# Altium PCB PCB.PcbDoc
Units mm, origin at the board's own origin, x right, y up, seen from the top; angles counter-clockwise.
Board outline 50 x 32.6 mm, 2 copper layers (Top Layer, Bottom Layer); 14 components, 11 nets, 41 pads, 0 vias.
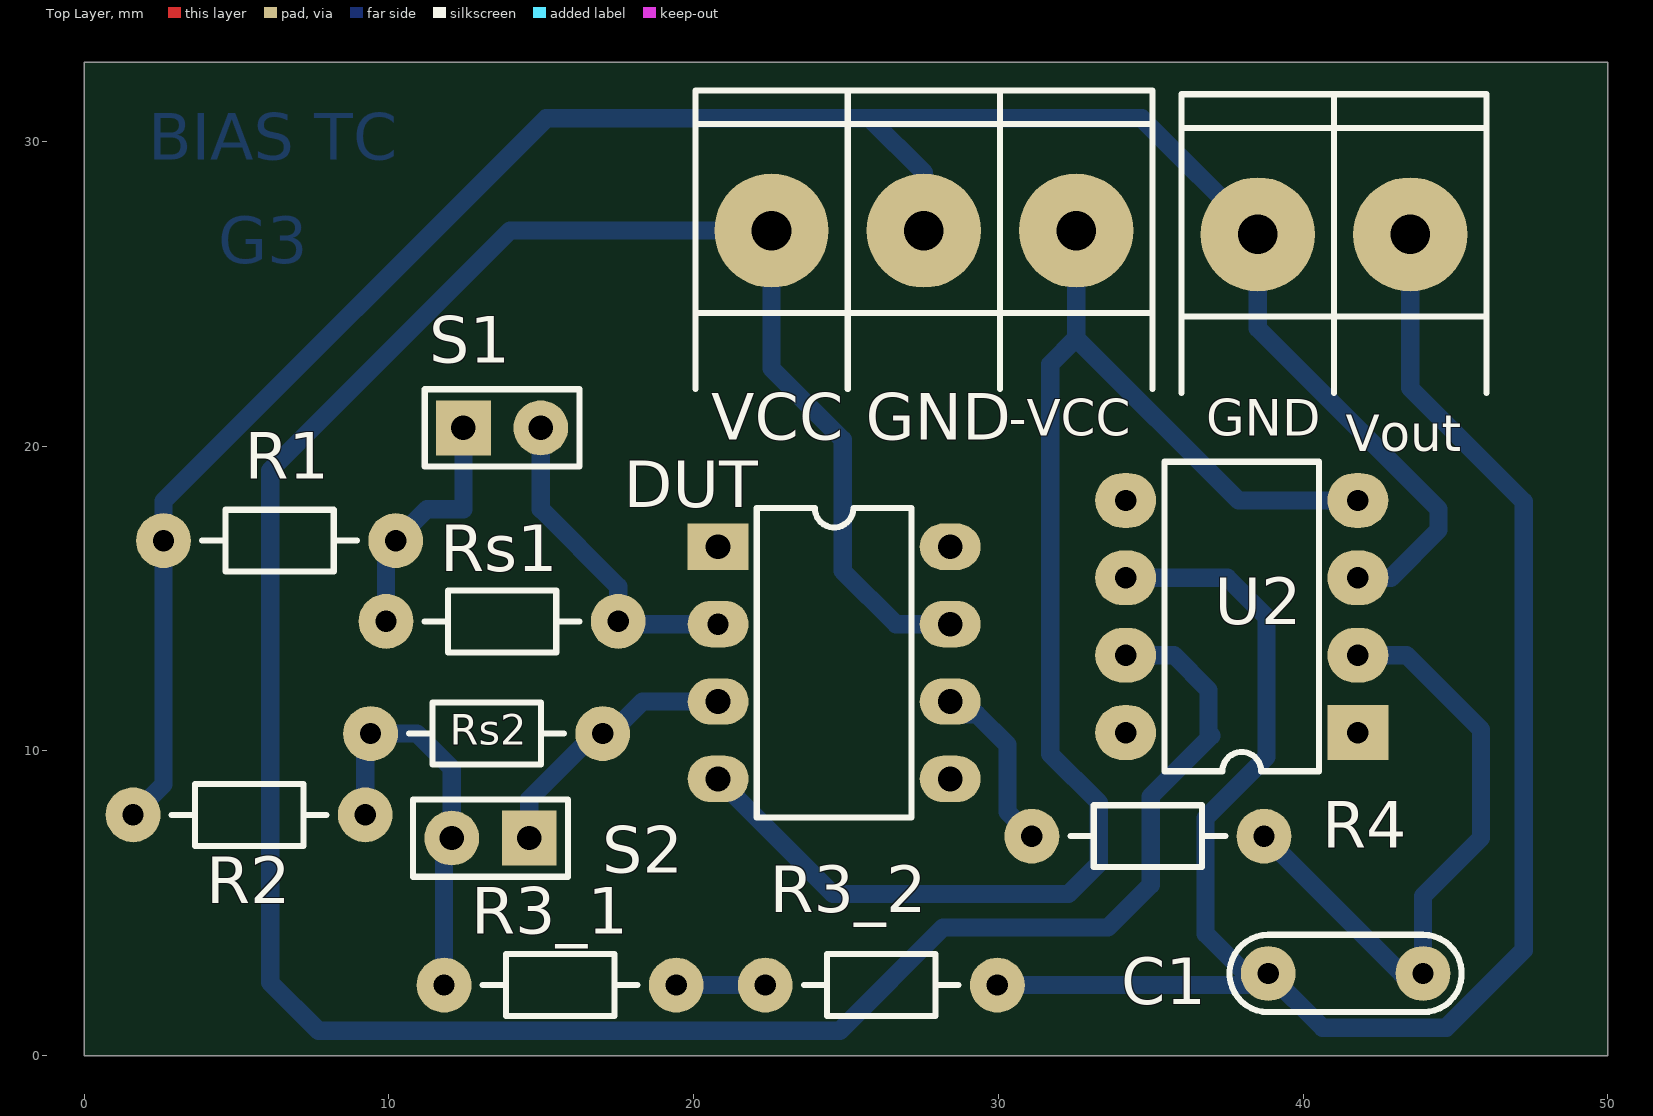
[diagram p0: Top Layer view]
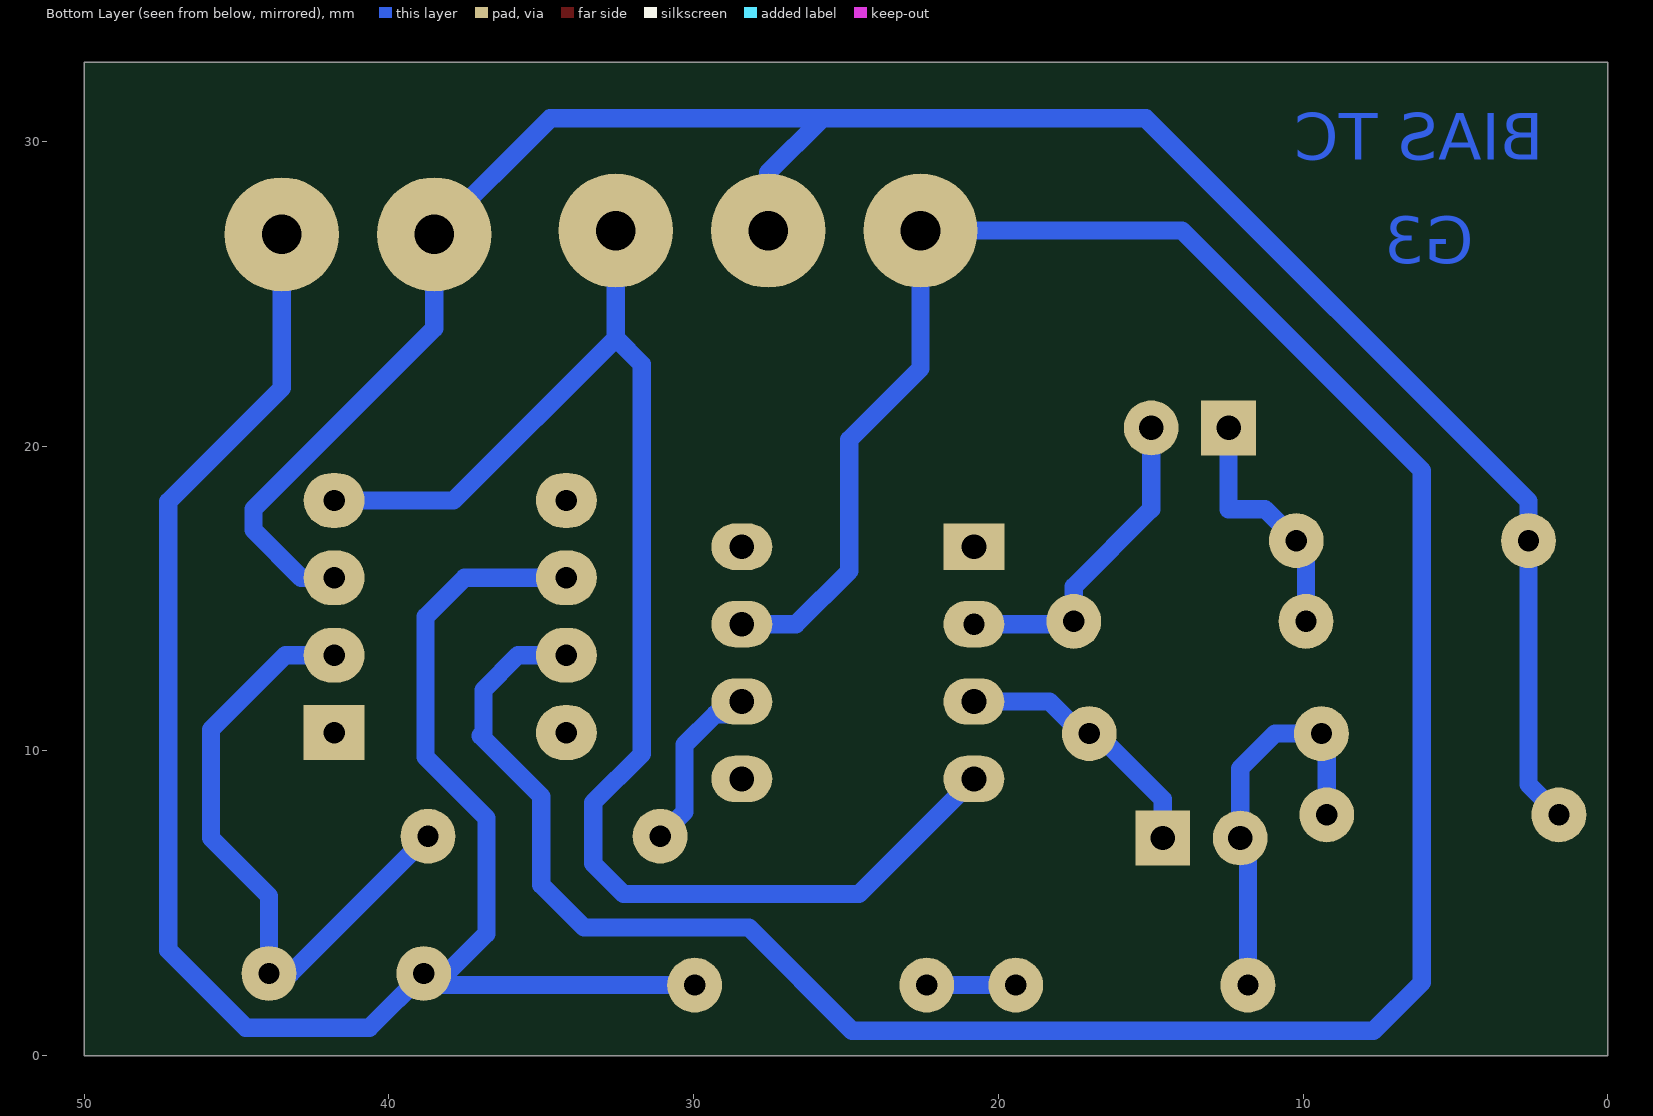
[diagram p1: Bottom Layer view, seen from below]
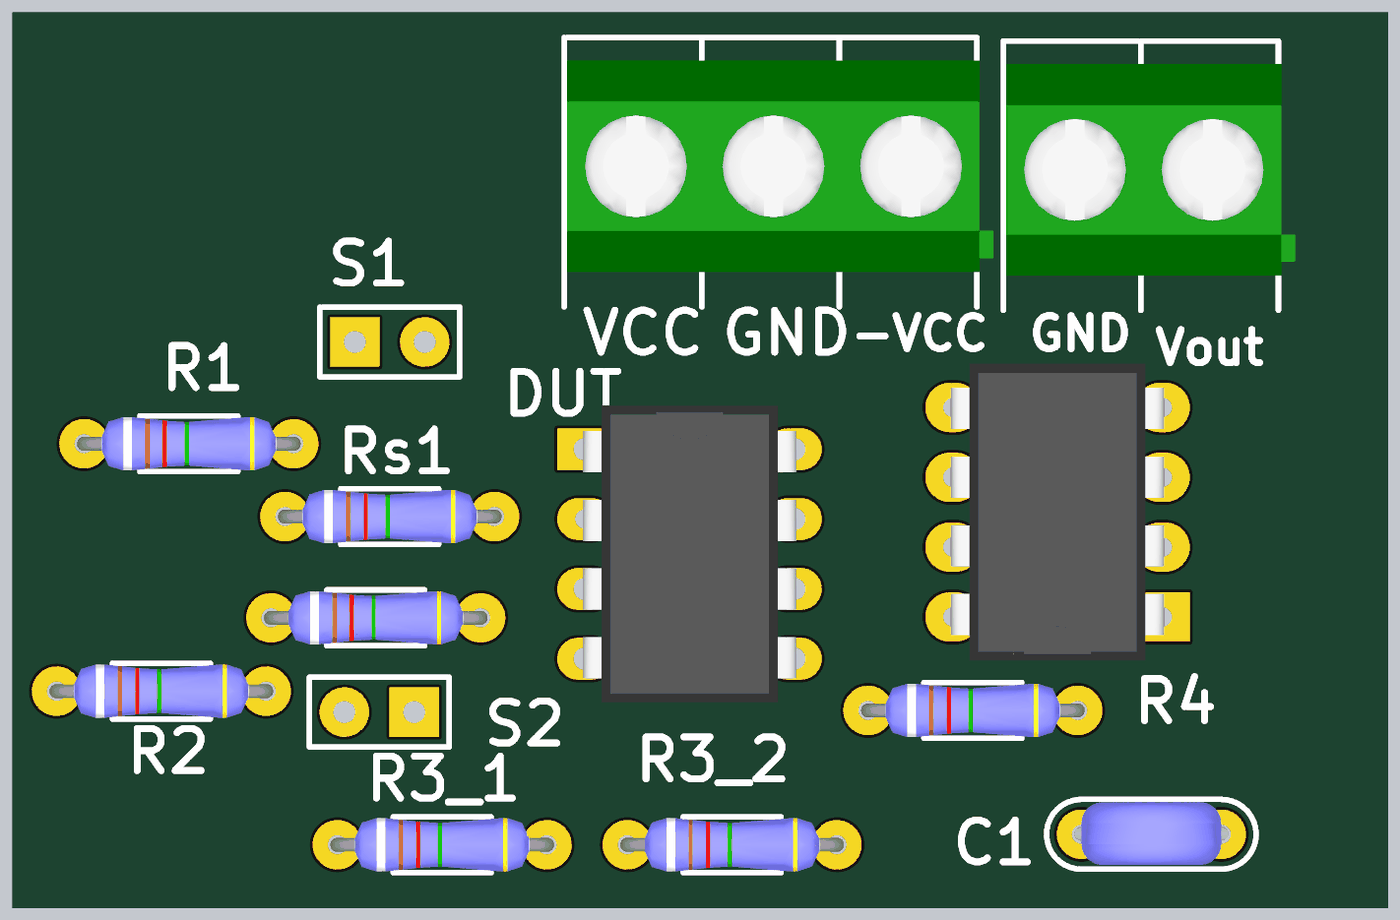
[diagram p2: 3D render of the assembled board from above, using the file's embedded part models]

## Layer stack, top to bottom
Top Solder: solder mask 0.0102, Solder Resist, Dk 3.5
Top Layer: signal copper 0.0356
Dielectric 1: dielectric 0.32, FR-4, Dk 4.8
Bottom Layer: signal copper 0.0356
Bottom Solder: solder mask 0.0102, Solder Resist, Dk 3.5

## Board outline
0,0 50,0 50,32.6 0,32.6

## Design rules (kind name [scope] priority, off if disabled: settings)
Clearance [All] p1: gap=0.3
PolygonConnect [All] p1: connectstyle=Relief reliefconductorwidth=0.254 reliefentries=4 polygonreliefangle="90 Angle" airgapwidth=0.254
RoutingVias [All] p1: holewidth=0.711 width=1.27 viastyle="Through Hole" minholewidth=0.711 minwidth=1.27 maxholewidth=0.711 maxwidth=1.27
SolderMaskExpansion [All] p1: expansion=0.102
Width [All] p1: maxlimit=0.6 minlimit=0.6 preferedwidth=0.6
30 further rules are at their usual default settings.

## Classes and differential pairs
component class esquematico: C1 DUT R1 R2 R3_1 R3_2 R4 Rs1 Rs2 S1 S2 VCC Vout

## Components (designator, comment, footprint, x,y, rotation, side; value= is the part's Value field where it differs from the comment)
C1 "100n" CAP200 41.399,2.694 r180 top
DUT "TL081ACD" DIP8#1 20.8,16.7 r0 top
R1 "10" RES300 2.6,16.9 r0 top
R2 "10" RES300 1.6,7.9 r0 top
R3_1 "3.3k" RES300 11.808,2.313 r0 top
R3_2 "4.7k" RES300 22.349,2.313 r0 top
R4 "100k" RES300 31.1,7.2 r0 top
Rs1 "1M" RES300 9.903,14.251 r0 top
Rs2 "1M" RES300 9.395,10.568 r0 top
S1 "Header 2" HDR1X2 12.443,20.601 r0 top
S2 "Header 2" HDR1X2 14.602,7.139 r180 top
U2 "TL081ACD" DIP8#2 41.8,10.6 r180 top
VCC "BORNERA 3" BORNERA3 27.556,27.078 r270 top (schematic designator Pol)
Vout "Alimentacion" BORNERA2 41.018,26.951 r270 top

## Footprints (in the part's own frame and the unit in brackets; to place one, negate y for a bottom-side part, rotate by r counter-clockwise, add the part's x,y. Pads: shape width x height; smd on the part's side, far side on the other; paste and mask are expansions set on the pad)
BORNERA2 [mm] "Bornera con Tornillos 5mm separación"
  round 3.75 hole 1.3: 1(0,2.5) 2(0,-2.5)
  silkscreen extent -4.6,-5 5.2,5, body extent -3.76,-4.89 3.94,5.61, height 10
BORNERA3 [mm] "Bornera con Tornillos 5mm separación"
  round 3.75 hole 1.3: 1(0,5) 2(0,0) 3(0,-5)
  silkscreen extent -4.6,-7.5 5.2,7.5, body extent -3.76,-7.39 3.94,8.11, height 10.05
CAP200 [mm]
  round 1.8 hole 0.7: 1(-2.54,0) 2(2.54,0)
  silkscreen extent -3.81,-1.27 3.81,1.27, body extent -2.79,-1.17 2.79,1.12, height 6.24
DIP8#1 [mil]
  rect 78.74x60 hole 32: 1(0,0)
  oval 78.74x60 hole 27.56: 2(0,-100)
  oval 78.74x60 hole 32: 3(0,-200) 4(0,-300) 5(300,-300) 6(300,-200) 7(300,-100) 8(300,0)
  silkscreen extent 50,-350 250,50, body extent -3,-363 303,63, height 177
DIP8#2 [mil]
  rect 78.74x70.87 hole 27.56: 1(0,0)
  oval 78.74x70.87 hole 27.56: 2(0,-100) 3(0,-200) 4(0,-300) 5(300,-300) 6(300,-200) 7(300,-100) 8(300,0)
  silkscreen extent 50,-350 250,50, body extent -3,-363 303,63, height 177
HDR1X2 [mm] "Connector; Header; 2 Position"
  rect 1.8x1.8 hole 0.8: 1(0,0)
  round 1.8 hole 0.8: 2(2.54,0)
  silkscreen extent -1.27,-1.27 3.81,1.27
RES300 [mm]
  round 1.8 hole 0.7: 1(0,0) 2(7.62,0)
  silkscreen extent 1.27,-1.02 6.35,1.02, body extent -0.25,-0.97 7.87,0.97, height 2.01

## Part data
C1: library part CAP
DUT U2: "JFET-Input Operational Amplifier, 7 to 36 V, 0 to 70 degC, 8-pin SOIC (D8), Green (RoHS & no Sb/Br)"
R1 R2 R3_1 R3_2 R4 Rs1 Rs2: library part RES
S1 S2: "Header, 2-Pin"
Vout: library part "BORNERA 2"

## Nets (pads, with @x,y where several pads share a name; then routed paths per layer and width w, separated by ;. In a path a pad name is that pad's centre, name@x,y a point inside that pad or via, vN(x,y) a via of type N, cw(c..) or ccw(c..) an arc to the next point about the centre after c; other vN are vias at no path point)
-VCC: DUT.4 U2.4 VCC.1 | length 49
  Bottom Layer w0.6: DUT.4 24.58,5.3 32.3,5.3 33.3,6.3 33.3,8.3 31.7,9.9 31.7,22.688 32.556,23.544 ; VCC.1@31.62,26.142 VCC.1 32.556,23.544 ; U2.4 37.88,18.22 32.556,23.544
GND: R1.1 R2.1 U2.3 VCC.2 Vout.2 | length 73.3
  Bottom Layer w0.6: R2.1 2.6,8.9 R1.1 2.6,18.2 15.161,30.761 25.778,30.761 ; VCC.2 27.556,28.983 25.778,30.761 ; U2.3 42.88,15.68 44.447,17.247 44.447,17.934 38.518,23.863 Vout.2 34.708,30.761 25.778,30.761
NetC1_1: C1.1 R4.2 U2.2 | length 20.9
  Bottom Layer w0.6: R4.2 43.226,2.694 C1.1 43.939,5.234 45.844,7.139 45.844,10.695 43.399,13.14 U2.2
NetC1_2: C1.2 R3_2.2 U2.6 Vout.1 | length 63.2
  Bottom Layer w0.6: R3_2.2 38.478,2.313 C1.2 ; U2.6 37.52,15.68 38.8,14.4 38.8,9.8 36.8,7.8 36.8,4 38.106,2.694 C1.2 ; Vout.1 43.518,21.911 47.241,18.188 47.241,3.456 44.701,0.916 40.637,0.916 C1.2
NetDUT_2: DUT.2 Rs1.2 S1.2 | length 10.7
  Bottom Layer w0.6: S1.2 14.983,17.934 17.523,15.394 Rs1.2 17.614,14.16 DUT.2
NetDUT_3: DUT.3 Rs2.2 S2.1 | length 8.2
  Bottom Layer w0.6: S2.1@14.602,7.647 14.602,8.409 Rs2.2@16.888,10.695 ; Rs2.2 17.268,10.568 18.32,11.62 DUT.3
NetDUT_6: DUT.6 R4.1 | length 5.8
  Bottom Layer w0.6: DUT.6 28.84,11.2 29.3,11.2 30.3,10.2 30.3,8 R4.1
NetR1_2: R1.2 Rs1.1 S1.1 | length 8.1
  Bottom Layer w0.6: Rs1.1 9.903,16.583 R1.2 11.254,17.934 12.443,17.934 S1.1
NetR2_2: R2.2 R3_1.1 Rs2.1 S2.2 | length 12.6
  Bottom Layer w0.6: R2.2 9.22,10.393 Rs2.1 10.919,10.568 12.062,9.425 S2.2@12.062,7.647 ; R3_1.1 11.808,6.885 S2.2
NetR3_1_2: R3_1.2 R3_2.1 | length 2.9
  Bottom Layer w0.6: R3_1.2 R3_2.1
VCC: DUT.7 U2.7 VCC.3 | length 94.9
  Bottom Layer w0.6: DUT.7 26.64,14.16 24.889,15.911 24.889,20.22 22.556,22.553 VCC.3 13.978,27.078 6.1,19.2 6.1,2.4 7.687,0.813 24.8,0.813 28.187,4.2 33.6,4.2 35,5.6 35,8.5 37,10.5 36.9,10.6 36.9,12 35.76,13.14 U2.7
pads on no net: DUT.1 DUT.5 DUT.8 U2.1 U2.5 U2.8

## Other copper
Bottom Layer:
  text "BIAS TC" at 2.1,29.4 h1.52
  text "G3" at 4.4,26 h1.52

## Silkscreen, mask and mechanical layers (free items; w line width, h text height)
Top Overlay:
  text "-VCC" at 30.35,20.347 h1.2
  text "GND" at 36.827,20.347 h1.2
  text "GND" at 25.651,20.22 h1.52